# Altium PCB 创意组电机驱动.PcbDoc
Units mil, origin at the board's own origin, x right, y up, seen from the top; angles counter-clockwise.
Board outline 3300 x 1700 mil, 2 copper layers (Top Layer, Bottom Layer); 68 components, 50 nets, 201 pads, 117 vias.
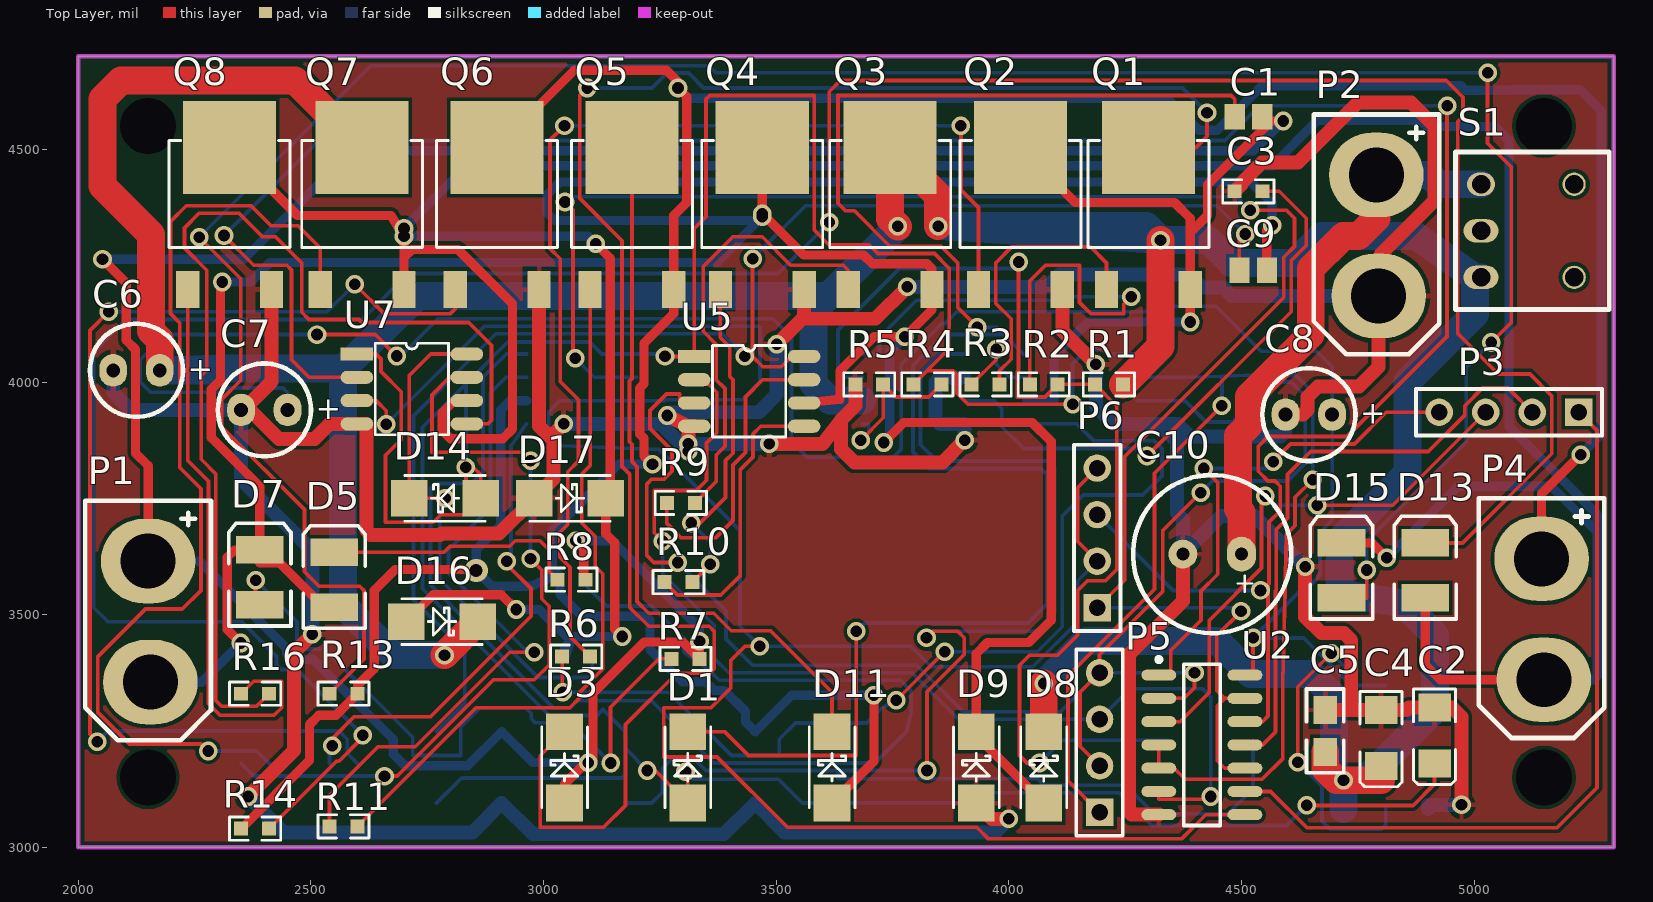
[diagram p0: Top Layer view]
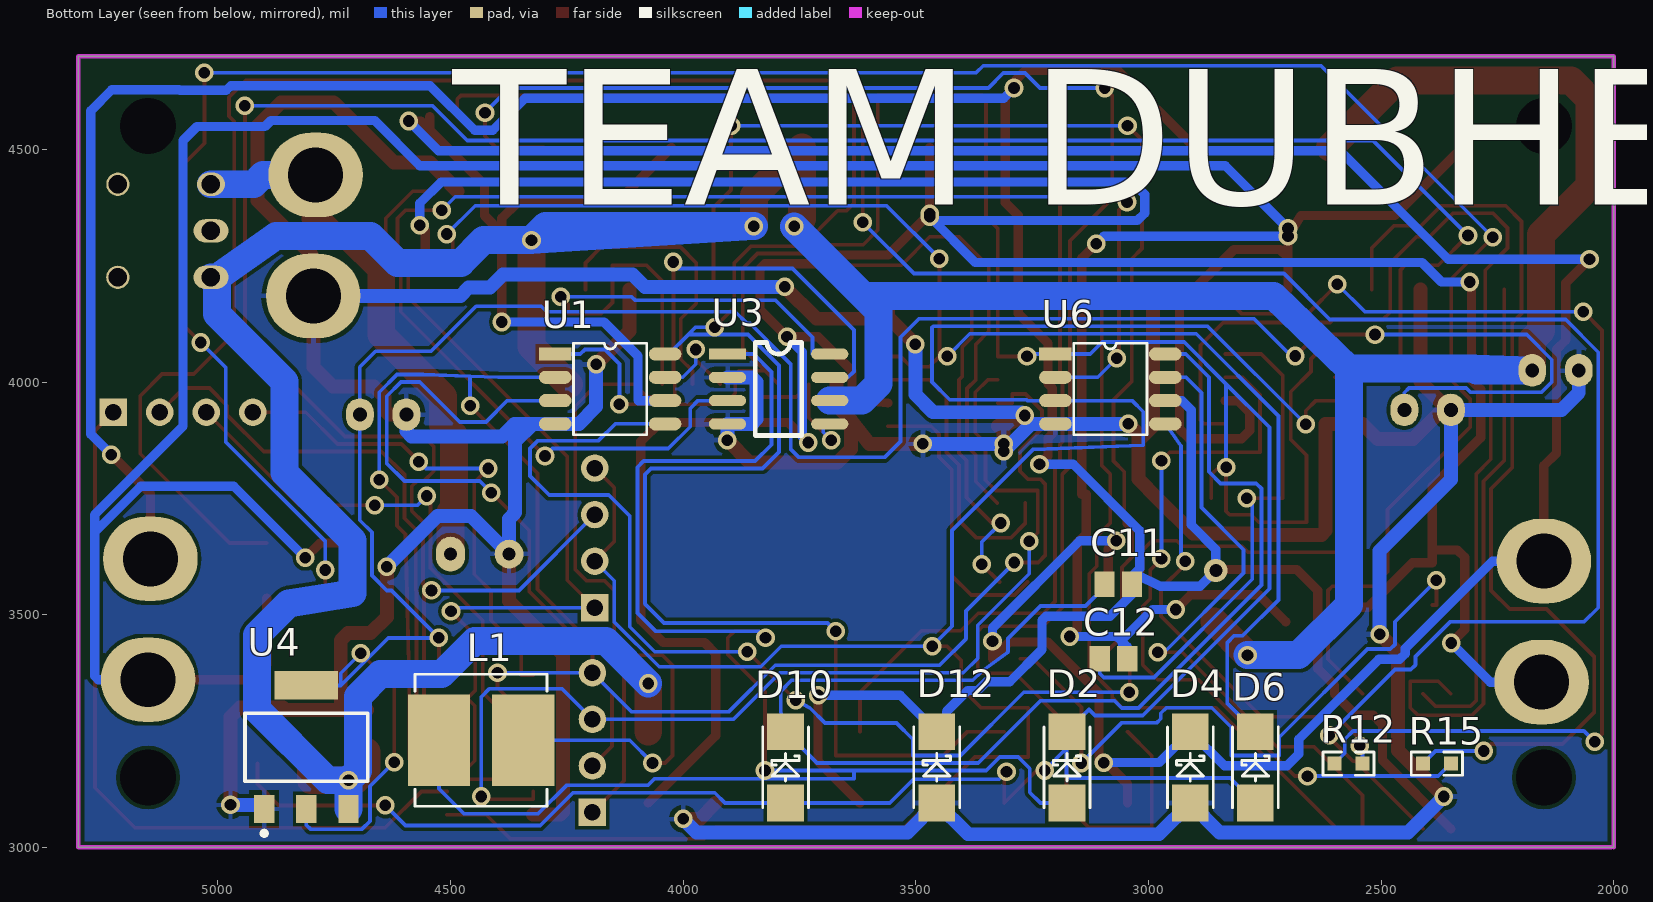
[diagram p1: Bottom Layer view, seen from below]
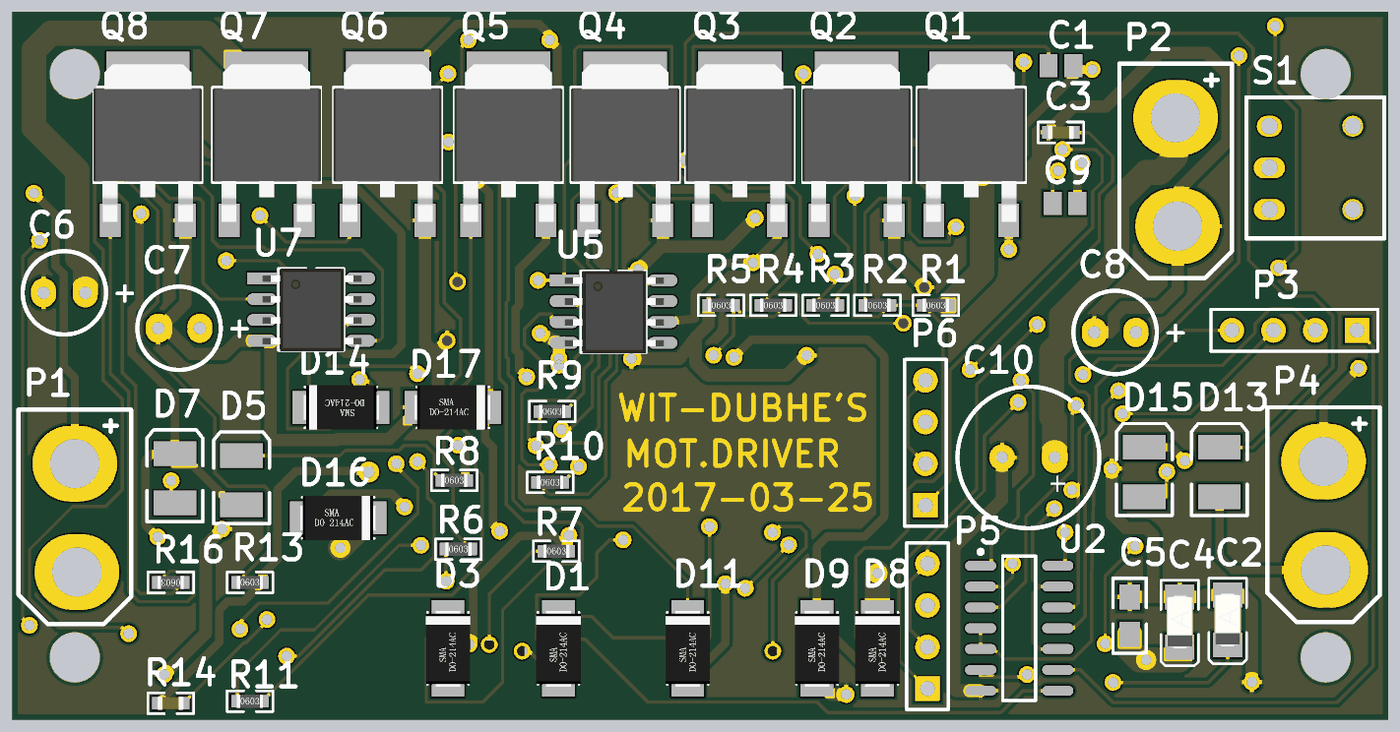
[diagram p2: 3D render of the assembled board from above, using the file's embedded part models]
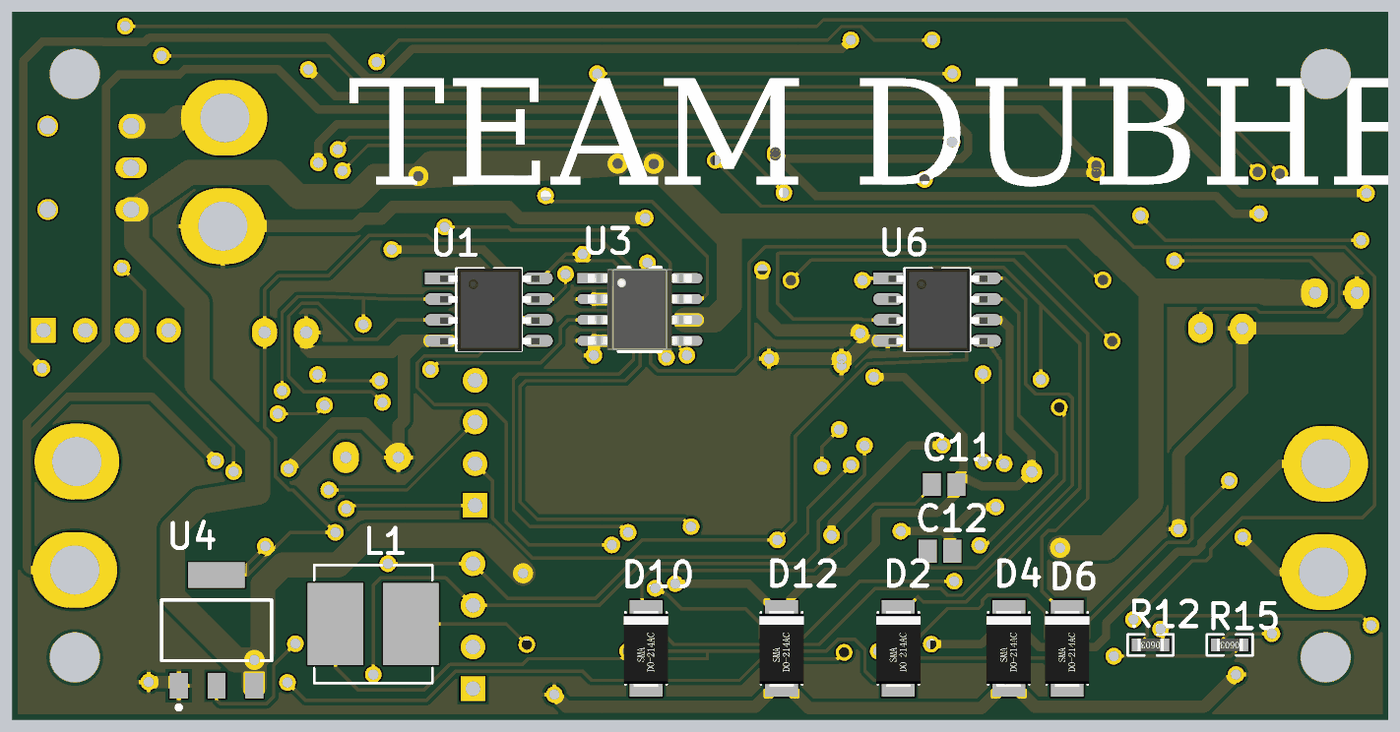
[diagram p3: 3D render of the assembled board from below, using the file's embedded part models]

## Layer stack, top to bottom
Top Solder: solder mask 0.4, Solder Resist, Dk 3.5
Top Layer: signal copper 1.4
Dielectric 1: dielectric 12.6, FR-4, Dk 4.8
Bottom Layer: signal copper 1.4
Bottom Solder: solder mask 0.4, Solder Resist, Dk 3.5

## Board outline
5300,3000 2000,3000 2000,4700 5300,4700

## Design rules (kind name [scope] priority, off if disabled: settings)
Clearance [All] p1: gap=8
PolygonConnect [All] p1: connectstyle=Relief reliefconductorwidth=10 reliefentries=4 polygonreliefangle="90 Angle" airgapwidth=10
RoutingVias [All] p1: holewidth=25 width=40 viastyle="Through Hole" minholewidth=28 minwidth=50 maxholewidth=28 maxwidth=50
SolderMaskExpansion [All] p1: expansion=4
Width BATT_CON [InNet('BATT_CON')] p1: maxlimit=60 minlimit=60 preferedwidth=60 minimp=50.000000 maximp=50.000000 favimp=50.000000
Width BATT [InNet('BATT')] p2: maxlimit=60 minlimit=60 preferedwidth=60 minimp=50.000000 maximp=50.000000 favimp=50.000000
Width GND [InNet('GND')] p3: maxlimit=30 minlimit=30 preferedwidth=30 minimp=50.000000 maximp=50.000000 favimp=50.000000
Width R- [InNet('PWR_OUT_R-')] p4: maxlimit=20 minlimit=20 preferedwidth=20 minimp=50.000000 maximp=50.000000 favimp=50.000000
Width R+ [InNet('PWR_OUT_R+')] p5: maxlimit=20 minlimit=20 preferedwidth=20 minimp=50.000000 maximp=50.000000 favimp=50.000000
Width L+ [InNet('PWR_OUT_L+')] p6: maxlimit=20 minlimit=20 preferedwidth=20 minimp=50.000000 maximp=50.000000 favimp=50.000000
Width L- [InNet('PWR_OUT_L-')] p7: maxlimit=20 minlimit=20 preferedwidth=20 minimp=50.000000 maximp=50.000000 favimp=50.000000
Width [All] p8: maxlimit=8 minlimit=8 preferedwidth=8
29 further rules are at their usual default settings.

## Components (designator, comment, footprint, x,y, rotation, side; value= is the part's Value field where it differs from the comment)
C1 "Cap Pol1" C0805 4515,4570 r0 top
C2 "10uF" 3216-CAP-TA 4915,3180 r90 top
C3 "470pF" 0603-CAP 4485,4410 r0 top
C4 "10uF" 3216-CAP-TA 4800,3175 r90 top
C5 "Cap Pol3" 0805 4680,3205 r90 top
C6 "Cap Pol1" "RB.1/.2 - duplicate" 2125,4025 r0 top
C7 "Cap Pol1" "RB.1/.2 - duplicate" 2400,3940 r0 top
C8 "Cap Pol1" "RB.1/.2 - duplicate" 4645,3930 r0 top
C9 "Cap Pol1" C0805 4525,4240 r0 top
C10 "Cap Pol1" CAPP 4500,3630 r180 top
C11 "Cap Pol1" C0805 3065,3565 r180 bottom
C12 "Cap Pol1" C0805 3075,3405 r180 bottom
D1 "Diode 1N4007" DO-214AC(SMA)-SBD 3310,3095 r90 top
D2 "1N5819" DO-214AC(SMA)-SBD 3174.99,3095 r90 bottom
D3 "1N5822" DO-214AC(SMA)-SBD 3045,3095 r90 top
D4 "1N5822" DO-214AC(SMA)-SBD 2909.99,3095 r90 bottom
D5 "LED0" 3.5X2.8X1.9 2550,3575 r90 top
D6 "Diode 1N4007" DO-214AC(SMA)-SBD 2769.99,3095 r90 bottom
D7 "LED0" 3.5X2.8X1.9 2390,3580 r90 top
D8 "1N5822" DO-214AC(SMA)-SBD 4075.01,3095 r90 top
D9 "1N5822" DO-214AC(SMA)-SBD 3930.01,3095 r90 top
D10 "Diode 1N4007" DO-214AC(SMA)-SBD 3779.99,3095 r90 bottom
D11 "1N5822" DO-214AC(SMA)-SBD 3620,3095 r90 top
D12 "1N5822" DO-214AC(SMA)-SBD 3454.99,3095 r90 bottom
D13 "LED0" 3.5X2.8X1.9 4895,3595 r90 top
D14 "Diode 1N4007" DO-214AC(SMA)-SBD 2865,3750 r180 top
D15 "LED0" 3.5X2.8X1.9 4715,3595 r90 top
D16 "1N5822" DO-214AC(SMA)-SBD 2705,3485 r0 top
D17 "1N5822" DO-214AC(SMA)-SBD 2980,3750 r0 top
L1 "330uH" Inductor_7*7*4 4525,3230 r180 bottom
P1 "POWER" POWER 2155,3355 r90 top
P2 "POWER" POWER 4795,4185 r90 top
P3 "Header 4" HDR1X4 5225,3935 r180 top
P4 "POWER" POWER 5150,3360 r90 top
P5 "Header 4" HDR1X4 4195,3075 r90 top
P6 "Header 4" HDR1X4 4190,3515 r90 top
Q1 "MOSFET N" TO-252 4210,4199 r0 top
Q2 "MOSFET N" TO-252 3935,4199 r0 top
Q3 "MOSFET N" TO-252 3655,4199 r0 top
Q4 "MOSFET N" TO-252 3380,4199 r0 top
Q5 "MOSFET N" TO-252 3100,4199 r0 top
Q6 "MOSFET N" TO-252 2810,4199 r0 top
Q7 "MOSFET N" TO-252 2520,4199 r0 top
Q8 "MOSFET N" TO-252 2235,4199 r0 top
R1 "0.22R" 0603-RES 4185,3995 r0 top
R2 "180R" 0603-RES 4045,3995 r0 top
R3 "Res1" 0603-RES 3920,3995 r0 top
R4 "10K" 0603-RES 3795,3995 r0 top
R5 "1.2K" 0603-RES 3670,3995 r0 top
R6 "Res1" 0603-RES 3040,3410 r0 top
R7 "Res1" 0603-RES 3275,3405 r0 top
R8 "Res1" 0603-RES 3030,3575 r0 top
R9 "Res1" 0603-RES 3265,3740 r0 top
R10 "Res1" 0603-RES 3260,3570 r0 top
R11 "Res1" 0603-RES 2540,3045 r0 top
R12 "Res1" 0603-RES 2540,3180 r0 bottom
R13 "Res1" 0603-RES 2540,3330 r0 top
R14 "Res1" 0603-CAP 2410,3040 r180 top
R15 "Res1" 0603-RES 2350,3180 r0 bottom
R16 "Res1" 0603-RES 2410,3330 r180 top
S1 "SW" SW 5015,4325 r0 top
U1 "IR2104S" SOIC-8 4275,4060 r180 bottom
U2 "74AC04M" SO14_L 4415,3220 r0 top
U3 "MC34063" SOP-8 3905,4060 r180 bottom
U4 "REG1117-3.3" ZZ311 4810,3215 r180 bottom
U5 "IR2104S" SOIC-8 3323.78,4055 r0 top
U6 "IR2104S" SOIC-8 3200,4060 r180 bottom
U7 "IR2104S" SOIC-8 2598.78,4060 r0 top

## Footprints (in the part's own frame and the unit in brackets; to place one, negate y for a bottom-side part, rotate by r counter-clockwise, add the part's x,y. Pads: shape width x height; smd on the part's side, far side on the other; paste and mask are expansions set on the pad)
3.5X2.8X1.9 [mm] "SM LED; 2 C-Bend Leads; Body 3.5 x 2.8 x 1.9 mm, inc leads (LxWxH typ)"
  rect 1.5x2.6 smd: 1(-1.5,0) 2(1.5,0)
  silkscreen extent -2.65,-1.7 2.95,1.7
0603-CAP [mil]
  rect 30x30 smd: 1(0,0) 2(60,0)
  silkscreen extent -25,-25 85,25, body extent -1,-16 61,16, height 24
0603-RES [mil]
  rect 30x30 smd: 1(0,0) 2(60,0)
  silkscreen extent -25,-25 85,25, body extent -1,-16 62,16, height 18
0805 [mil]
  rect 60x50 smd: 1(0,0) 2(90,0)
  silkscreen extent -45,-40 135,40
3216-CAP-TA [mil]
  rect 60x70 smd: 1(0,0) 2(120,0)
  silkscreen extent -45,-45 160,45, body extent -3,-31 123,32, height 63
C0805 [mm] "Chip Capacitor, Body 2.0x1.3mm, IPC High Density"
  rect 1.1x1.4 smd: 1(-0.75,0) 2(0.75,0)
  body extent -1.1,-0.72 1.1,0.72, height 1.4
CAPP [mil]
  oval 62x75 hole 28: 1(0,0)
  round 62 hole 28: 2(126,0)
  silkscreen extent -107,-170 233,170
DO-214AC(SMA)-SBD [mm]
  rect 2x2 smd: 1(0,0) 2(3.9,0)
  silkscreen extent -0.25,-1.25 4.15,1.25, body extent -0.37,-1.35 4.23,1.35, height 2.4
HDR1X4 [mm] "Connector; Header; 4 Position"
  rect 1.5x1.5 hole 0.9: 1(0,0)
  round 1.5 hole 0.9: 2(2.54,0) 3(5.08,0) 4(7.62,0)
  silkscreen extent -1.27,-1.27 8.89,1.27
Inductor_7*7*4 [mm]
  rect 3.4x5 smd: 1(0,0) 2(4.6,0)
  silkscreen extent -1.3,-3.6 5.9,3.6
POWER [mm]
  oval 4.615x5.159 hole 3: 1(0,0) 2(6.604,0.127)
  silkscreen extent -3.17,-3.3 9.91,3.56
"RB.1/.2 - duplicate" [mil]
  oval 60x70 hole 30: 1(50,0) 2(-50,0)
  silkscreen extent -100,-100 100,100
SO14_L [mm] "SOIC, 14-Leads, Body 8.7x3.9mm, Pitch 1.27mm, IPC High Density"
  oval 1.9x0.6 smd: 1(-2.35,3.81) 2(-2.35,2.54) 3(-2.35,1.27) 4(-2.35,0) 5(-2.35,-1.27) 6(-2.35,-2.54) 7(-2.35,-3.81) 8(2.35,-3.81) 9(2.35,-2.54) 10(2.35,-1.27) 11(2.35,0) 12(2.35,1.27) 13(2.35,2.54) 14(2.35,3.81)
  silkscreen extent -2.47,-4.4 1,4.78, body extent -1.95,-4.33 1.95,4.33, height 1.75
SOIC-8 [mm]
  rect 1.78x0.72 smd: 1(0,0)
  oval 1.78x0.72 smd: 2(0,-1.27) 3(0,-2.54) 4(0,-3.81) 5(6,-3.81) 6(6,-2.54) 7(6,-1.27) 8(6,0)
  silkscreen extent 1,-4.41 5,0.6, body extent 0.03,-4.44 6.07,0.58, height 1.6
SOP-8 [mil]
  rect 80x24 smd: 1(0,0)
  oval 80x24 smd: 2(0,-50) 3(0,-100) 4(0,-150) 5(220,-150) 6(220,-100) 7(220,-50) 8(220,0)
  silkscreen extent 60,-175 160,25, body extent -15,-173 235,24, height 74
SW [mil]
  oval 75x50 hole 40: 1(0,0) 3(0,-100)
  oval 60x50 hole 40: 2(0,100)
  round 50 hole 40: ""(200,100) ""(200,-100)
  silkscreen extent -55,-169 276,169
TO-252 [mil]
  rect 50x80 smd: 1(0,0) 3(180,0)
  rect 200x200 smd: 2(90,305)
  silkscreen extent -40,90 220,320, body extent -40,-4 220,374, height 92
ZZ311 [mm] "SOT-223/SC-73; 4 Leads; Body 6.7 x 7.3 mm, inc. leads (LxW max)"
  rect 1.1x1.55 smd: 1(-2.3,-3.375) 2(0,-3.375) 3(2.3,-3.375)
  rect 3.45x1.55 smd: 4(0,3.375)
  silkscreen extent -3.35,-4.82 3.35,1.85

## Part data
C1 C6 C7 C8 C9 C10 C11 C12: "Polarized Capacitor (Radial)"
C2 C4: library part CAP_TA_3216
C3: library part CAP_0603
C5: "Polarized Capacitor (Surface Mount)"
D1 D6 D10 D14: "1 Amp General Purpose Rectifier"
D3 D4 D8 D9 D11 D12 D16 D17: library part 1N4760A, "One Watt Hermetically Sealed Glass Silicon Zener Diode"
D5 D7 D13 D15: "Typical INFRARED GaAs LED"
L1: library part inductor_7*7*4
P3 P5 P6: "Header, 4-Pin"
R1 R2 R4 R5: library part RES_0603
R3 R6 R7 R8 R9 R10 R11 R12 R13 R14 R15 R16: "Resistor"
U2: "Hex Inverter"
U4: "800mA and 1A Low Dropout Positive Regulator 2.85V, 3.3V, 5V, and Adjustable"

## Free pads (board coordinates)
  round 60 hole 120: 0(2150,3150) 1(5150,3150) 2(2150,4550) 3(5150,4550)

## Via types
v1: diameter 40, hole 25, Top Layer to Bottom Layer, 116 vias
v2: diameter 50, hole 28, Top Layer to Bottom Layer, 1 vias

## Nets (pads, with @x,y where several pads share a name; then routed paths per layer and width w, separated by ;. In a path a pad name is that pad's centre, name@x,y a point inside that pad or via, vN(x,y) a via of type N, cw(c..) or ccw(c..) an arc to the next point about the centre after c; other vN are vias at no path point)
12V: C2.1 D1.1 D2.2 D6.1 D10.1 D14.1 R4.1 U1.1 U5.1 U6.1 U7.1 | length 7413.6
  Top Layer w8: U7.1 2640,4060 2650.38,4049.62 2650.38,4022.49 2694,3978.87 2694,3876.67 2660,3842.67 2660,3698.63 2763,3698.63 2778.88,3714.5 2825.45,3714.5 2833,3722.05 v1(2833,3817) 2849,3817 2865,3801 D14.1 ; v1(3222.99,3165) 3240,3165 D1.1 3310,3157 v1(3305,3162) ; v1(3261,4055) U5.1 3324,4055 3324,4330 3349,4355 3349,4608 3357,4616 3582,4616 3582,4326 3613,4295 3700,4295 3719,4276 3840,4276 3872,4244 3872,4072 3824,4024 ; R4.1 3824,4024 ; v1(4137,3952) 3912,3952 3888,3976 3888,4016 3880,4024 3824,4024 ; v1(4640,3090) 4869,3090 4915,3136 C2.1
  Bottom Layer w8: D6.1 2823.99,3149 3168,3149 3176,3157 D2.2@3176,3213 ; v1(2833,3817) 2833,3996 ; v1(3222.99,3165) D2.2@3176,3213 ; v1(3261,4055) 3256,4060 U6.1 3125.17,4060 3099,4086.17 2923.17,4086.17 2833,3996 ; v1(3305,3162) 3320.63,3146.37 3504.63,3146.37 3556,3095 D10.1 3910,3095 3932,3117 4237,3117 4307,3047 4597,3047 v1(4640,3090) ; v1(4137,3952) 4137,4039 4168,4070 4211,4070 4221,4060 U1.1 ; 2833,3996 2739.67,3902.67 2739.67,3555.62 3011.95,3283.34 3115,3283.34 3127.6,3295.94 D2.2 3174.99,3247.54 D2.2@3176,3213
BATT: C4.1 C5.1 C6.1 D8.2 D16.2 Q3.2 Q7.2 R1.2 S1.3 U3.6 U4.3 | length 9479.1
  Top Layer w60: C6.1 2175,4091 2156,4110 2156,4317.47 2052,4421.47 2052,4608 2092,4648 2466,4648 Q7.2 ; v1(2787,3413) 2787,3413.46 D16.2 ; v1(3761.5,4334.5) 3745,4351 Q3.2 3848,4401 v1(3848,4335) ; D8.2 v1(4075.01,3352) ; R1.2 4326,4076 v1(4326,4305) ; C5.1 4680,3168 4704,3144 v1(4719,3144) v1(4719.45,3144) 4800,3144 C4.1
  Bottom Layer w60: v1(2787,3413) 2677,3413 2569,3521 2569,4029 ; U3.6 3616,3960 3580,3996 3580,4153 3612,4185 ; v1(3761.5,4334.5) 3612,4185 ; v1(4075.01,3352) 4166.01,3443 4448,3443 4519,3372 4651,3372 4699.05,3323.95 4699.05,3164.4 4719,3144.45 v1(4719,3144) v1(4719.45,3144) ; U4.3 v1(4719.45,3144) ; S1.3 S1.3@5002,4225 ; 2299,4029 2569,4029 ; 2299,4029 2295,4025 C6.1 2299,4029 ; 2569,4029 2730.72,4185 3612,4185 ; v1(4326,4305) 4296,4335 v1(3848,4335) v1(4326,4305) ; v1(4326,4305) 4428.94,4305 4477.94,4256 4614,4256 4672,4314 4875,4314 S1.3@5002,4225 ; v1(4719.45,3144) 4764,3144 4916,3296 4916,3456 4848.13,3523.87 4711,3546 4711,3659 4857,3805 4857,4001 5002,4146 S1.3@5002,4225
BATT_CON: C10.1 P2.2 S1.2 | length 1193.5
  Top Layer w60: C10.1 4500,3720 4493,3727 4493,3885 4516,3908 4516,3969 4649,4102 4649,4244 4719,4314 4752,4314 4790,4352 P2.2
  Bottom Layer w60: P2.2 4903,4445 4923,4425 S1.2
GND: C2.2 C3.1 C4.2 C5.2 C6.2 C7.2 C8.2 C10.2 D4.1 D9.1 D12.1 D17.1 P2.1 Q2.3 Q4.3 Q6.3 Q8.3 R5.1 U1.4 U2.7 U3.2 U3.4 U4.1 U5.4 U6.4 U7.4 | length 12553.2
  Top Layer w30: C7.2 C7.2@2354.45,3940 ; v1(2365,3109) 2464,3208 2464,3419 v1(2503,3458) ; Q8.3 2415,4000.55 C7.2@2354.45,3940 ; Q6.3 2990,3905 3021.16,3873.84 ; v1(3043,3910) 3021.16,3888.16 3021.16,3873.84 ; v1(3266,3928) U5.4@3311,3905 ; v1(3311,3851) v1(3311,3867) U5.4@3311,3905 ; U5.4 U5.4@3311,3905 ; v1(3485,3867) 3600,3867 3639,3918 ; v1(3501,4081) 3560,4140 3560,4144 ; Q4.3 3560,4144 ; R5.1 3670,3949 3639,3918 ; v1(3782,4204.5) 3713.5,4136 3568,4136 3560,4144 ; v1(3905,3875) 3857,3827 3668,3827 3639,3856 3639,3918 ; D9.1 3964.01,3061 v1(4000,3061) ; Q2.3 4115,4110 v1(4187,4038) ; U2.7 4264,3070 4258.53,3075.47 4258.53,3414 4374,3529.47 C10.2 ; C3.1 4500,4425 4500,4428 4544,4472 4622,4472 4751,4601 4864,4601 4915,4550 4915,4390 4800,4275 4800,4185 P2.1 4795,4032 4753,3990 4664,3990 4642,3968 4642,3940 4632,3930 C8.2 ; v1(4637,3603) 4637,3495.05 4672,3460.05 4720,3460.05 4736,3444.05 4736,3311 4720,3295 ; C5.2 4720,3295 ; v1(4973,3091) 4973,3280 4953,3300 C2.2 4860,3300 4855,3295 C4.2 4720,3295 ; C7.2@2354.45,3940 2369,3940 2431,3878 2508,3878 2540,3910 U7.4 2619,3910 2619,3680.41 2627.79,3671.63 2777.63,3671.63 2780,3674 2904,3674 D17.1 3021.16,3791.16 3021.16,3873.84
  Bottom Layer w30: C6.2 2075,3977 2112,3940 C7.2 2350,3790 2503,3637 v1(2503,3458) ; v1(2365,3109) 2442,3032 2846.99,3032 D4.1 2976.99,3028 3387.99,3028 D12.1 3517.99,3032 3971,3032 v1(4000,3061) ; v1(3043,3910) U6.4 3252,3910 v1(3311,3851) ; v1(3266,3928) 3273,3935 3462.95,3935 3501,3973.05 v1(3501,4081) ; v1(3311,3867) v1(3485,3867) ; v1(3782,4204.5) 4082.5,4204.5 4109,4231 4387,4231 4415,4203 4461,4203 4479,4185 P2.1 ; v1(3905,3875) U3.4 3852,3910 3842,3920 3842,4000 3852,4010 U3.2 ; v1(4187,4038) 4187,3947 4224,3910 U1.4 4323,3910 ; C8.2 4595,3894.29 4584,3883.29 4389,3883.29 4362.29,3910 4323,3910 ; v1(4637,3603) 4528,3712 4456,3712 C10.2 4374,3706 4361,3719 4361,3872 4323,3910 ; U4.1 4900.55,3091 v1(4973,3091)
MOTOR_DIR_L: P3.3 U2.3 | length 1171.4
  Top Layer w8: U2.3 4368,3270 4431,3333 4431,3488 4543,3600 4543,3747 v1(4551,3755) ; v1(4663,3735) 4825,3735 P3.3
  Bottom Layer w8: v1(4551,3755) 4571,3735 v1(4663,3735)
MOTOR_DIR_R: P3.2 U2.11 | length 1277
  Top Layer w8: U2.11 4545,3220 4573,3248 4573,3550.98 4575,3552.98 4575,3682.82 4599.18,3707 4599.18,3801.05 4648.79,3850.66 4901.66,3850.66 4980.18,3929.18 4980.18,3949.18 5017.94,3986.94 5073.06,3986.94 P3.2
MOTOR_PWM_L: P3.4 U2.1 | length 1079.9
  Top Layer w8: U2.1 4348,3370 4348,3423 4413,3488 4413,3551 4449,3587 4449,3784 v1(4419,3814) ; v1(4568,3829) 4605.66,3866.66 4742.66,3866.66 4811,3935 P3.4
  Bottom Layer w8: v1(4419,3814) 4553,3814 v1(4568,3829)
MOTOR_PWM_R: P3.1 U2.9 | length 1647.6
  Top Layer w8: U2.9 4562.59,3120 4640.59,3042 5178,3042 5264,3128 5264,3896 P3.1
NetC1_1: C1.1 D1.2 U1.8 | length 3801.7
  Top Layer w8: D1.2 3388.96,3248.54 3440.5,3197 3672,3197 v1(3672,3464) ; v1(3932,4118) 3890,4160 3890,4256 3854,4292 3744,4292 3668,4368 3649,4368 3633,4384 3633,4616 4477.47,4616 4485.47,4608 C1.1
  Bottom Layer w8: v1(3672,3464) 3690,3482 4041,3482 4082.12,3523.12 4082.12,3801.26 4069.38,3814 3829.37,3814 3794,3849.37 3794,4035.65 3860.35,4102 3988.79,4102 ; v1(3932,4118) 3972.79,4118 3988.79,4102 ; U1.8 4030.79,4060 3988.79,4102
NetC3_2: C3.2 U3.3 | length 1234.8
  Top Layer w8: v1(4297,3841) 4607,4151 4607,4261.4 4639.02,4293.42 4639.02,4352 4581.02,4410 C3.2
  Bottom Layer w8: U3.3 3968,3960 3985,3943 3985,3904 4032,3857 4281,3857 v1(4297,3841)
NetC9_1: C9.1 D6.2 U5.8 | length 3135.1
  Top Layer w8: v1(3432.58,4055) v1@3449.27,4055 ; v1(3449.27,4265.27) v1@3449.27,4055 ; U5.8 3533,4055 3511,4033 3471.27,4033 v1@3449.27,4055 ; C9.1 4495.47,4305.47 v1(4508,4318)
  Bottom Layer w8: D6.2 2830.26,3308.81 2830.26,3440.19 2816,3454.45 2797.64,3454.45 2720.51,3531.57 2720.51,3926.93 2897.08,4103.5 3384.08,4103.5 v1(3432.58,4055) ; v1(3449.27,4265.27) 3563,4379 4447,4379 v1(4508,4318)
NetC11_1: C11.1 D10.2 U6.8 | length 2771
  Bottom Layer w8: U6.8 2919.63,4060 2870,4010.37 2870,3807 2845,3782 2768,3782 2757,3771 2757,3563.8 3021.46,3299.34 3057.14,3299.34 3072.8,3315 3231.94,3315 3365.77,3181.17 3712.62,3181.17 D10.2 3790,3291.55 3790,3336 3767,3359 3377.34,3359 3358.83,3377.51 3301.67,3420 3301.67,3448.92 3232,3518.59 3134.94,3518.59 3094.53,3559 C11.1
NetC12_1: C12.1 D14.2 U7.8 | length 1113.1
  Top Layer w8: v1(2789,3750) D14.2 2711.46,4014.03 2757.43,4060 U7.8
  Bottom Layer w8: v1(2789,3750) 2777,3738 2777,3576 2988,3365 3096,3365 3104.53,3373.53 C12.1
NetD2_1: D2.1 L1.1 U3.1 | length 3396.3
  Top Layer w8: v1(3823,3450) 3837,3464 3890.44,3464 3904,3450.44 3904,3414.28 3824,3334.28 v1(3824,3165)
  Bottom Layer w8: D2.1 3232,3095 3255,3118 3255,3169 3280,3194 3319.5,3194 3348.5,3165 3633,3165 ; v1(3823,3450) 3837,3464 4058.5,3464 4098.12,3503.62 4098.12,3816.88 4085,3830 3845.37,3830 3810,3865.37 3810,4021.61 3848.39,4060 U3.1 ; v1(3824,3165) 3633,3165 ; L1.1 4525,3126 4471,3072 4312,3072 4251,3133 4076,3133 4062,3147 3633,3147 3633,3165
NetD3_2: D3.2 Q1.2 | length 3862.1
  Top Layer w8: D3.2 2993,3196.55 2993,3043 3129,3043 3176,3090 3176,3264 3286,3374 3357,3374 3367,3384 3367,3464 3356,3475 3226,3475 3184.92,3516.08 3184.92,3802 3168.74,3818.18 3168.74,4303.76 3078,4394.5 3078,4616 v1(3094,4632) ; Q1.2 4402,4504 4426,4528 v1(4426,4579)
  Bottom Layer w8: v1(3094,4632) 3233,4632 3265,4664 3312,4664 3344,4632 4373,4632 v1(4426,4579)
NetD5_2: D5.2 R8.1 | length 551.7
  Top Layer w8: D5.2 2786.06,3634.05 2799.01,3647 2927.43,3647 2939.17,3658.74 2992,3658.74 3012.04,3638.7 3012.04,3592.96 R8.1
NetD7_1: D7.1 R7.1 | length 1461.2
  Top Layer w8: v1(2381,3574) 2381,3520.94 D7.1 ; v1(3144,3181) 3144,3301 3248,3405 R7.1
  Bottom Layer w8: v1(2381,3574) 2470.15,3484.85 2470.15,3435.85 2480,3426 2529,3426 2718.62,3236.38 2718.62,3197.17 2822,3197.17 2822,3258 2864,3300 2961.28,3300 2973.28,3288 2973.28,3276.43 2982.37,3267.34 3057.66,3267.34 v1(3144,3181)
NetD11_2: D11.2 Q5.2 | length 1569.3
  Top Layer w8: Q5.2 3190,4007.26 3184.74,4002 3184.74,3871.43 3190,3866.17 3190,3828.92 3200.92,3818 3200.92,3528.1 3226.02,3503 3365.54,3503 3403.2,3465.35 3488,3465.35 3620,3333.35 D11.2
NetD13_2: D13.2 R14.1 | length 6148.1
  Top Layer w8: R14.1 2555.08,3185.08 2560,3185.08 2611,3236.08 v1(2611,3241) ; v1(3614,4343) 3614,4624 3638,4648 4940,4648 4976,4612 4976,4571 4965,4560 4965,4104 5052,4017 5120,4017 5167,3970 5167,3846 4975.05,3654.05 D13.2
  Bottom Layer w8: v1(2611,3241) 2470,3382 2436.15,3382 2426.15,3392 2426.15,3409.85 2351,3485 2063,3485 2033,3515 2033,4064 2103.17,4134.17 2610.04,4134.17 2708.86,4233 3504,4233 v1(3614,4343)
NetD15_1: D15.1 R13.1 | length 5504.9
  Top Layer w8: v1(2260,4311) 2349,4222 2349,4003.55 2308,3962.55 2308,3904 2486,3726 2486,3592 2517,3561 2605,3561 2614,3552 2614,3404 R13.1 ; D15.1 4769,3535.94 v1(4769,3596) ; v1(5029,4665) 5029,4513 5080,4462 5080,4128 v1(5037,4085)
  Bottom Layer w8: v1(2260,4311) 2629,4680 3355,4680 3370,4665 v1(5029,4665) ; v1(4769,3596) 4769,3657 4983,3871 4983,4031 v1(5037,4085)
NetL1_2: L1.2 R1.1 R2.2 U3.7 | length 2375.6
  Top Layer w8: v1(4021,4258) 4021,4025 4018,4022 4018,3968 4078,3968 R2.2 R1.1 4232,3948 4232,3597 4208,3573 4169,3573 4148,3552 4148,3456 4105,3413 4045,3413 4023,3391 4023,3197 4039,3181 v1(4066,3181)
  Bottom Layer w8: U3.7 3645.5,4010 3633,4022.5 3633,4112 3765,4244 4009,4244 4021,4256 v1(4021,4258) ; v1(4066,3181) 4115,3230 L1.2
NetP5_1: P5.1 U1.2 U2.4 U2.5 | length 2652.2
  Top Layer w8: P5.1 4127,3143 4127,3368.47 4313,3554.47 4313,3804 v1(4458,3949) ; U2.4 U2.5 4355,3170 4379,3146 4544,3146 4589,3191 4589,3354.18 4596.82,3672.63 4615.18,3691 4615.18,3752.18 v1(4653,3790)
  Bottom Layer w8: U1.2 4397,4010 4458,4012.58 ; v1(4458,3949) 4458,4012.58 ; v1(4653,3790) 4653,3978 4615,4016 4559,4016 4458,4012.58
NetP5_2: P5.2 P5.4 U1.3 U2.2 U5.3 | length 3538.6
  Top Layer w8: v1(3288,3612) 3237,3612 3222,3627 3222,3780.86 3232,3790.86 3258.86,3790.86 3276,3808 3276,3852.83 3228.74,3900.09 3228.74,3938.91 3264,3974.17 3292.74,3974.17 3292.74,3955 U5.3 ; P5.2 4153,3217 4153,3333 P5.4 4195,3413.84 4331,3549.84 4331,3680.82 v1(4412.18,3762) ; U2.2 4376,3320 4399,3343 v1(4399,3375)
  Bottom Layer w8: v1(3288,3612) 3392,3508 3392,3447.91 3448.91,3391 3802,3391 3901.48,3291.52 4111.52,3291.52 P5.4 v1(4399,3375) ; U1.3 4378,3960 4424,3914 4480,3914 4566,4000 4606.3,4000 4637,3969.3 4637,3824.86 4599.14,3787 4437.18,3787 v1(4412.18,3762)
NetP5_3: P5.3 U2.6 U5.2 | length 2294.1
  Top Layer w8: v1(3256,3658) 3238,3676 3238,3767 3328,3767 3350,3789 3350,3869 3372,3891 3372,3978 3345,4005 U5.2 ; U2.6 4322.48,3103 4428,3103 v1(4434,3109)
  Bottom Layer w8: v1(3256,3658) 3256,3588 3367,3477 3367,3406 3398,3375 3792,3375 3892,3275 P5.3 4261,3341 4416,3341 4434,3323 v1(4434,3109)
NetP6_1: P6.1 U2.10 U2.13 U6.2 | length 3876.5
  Top Layer w8: v1(3046,4387) 3063,4370 3063,4056 v1(3068,4051) ; P6.1 4249,3574 4249,3839.89 4591,4181.89 4591,4268.03 4614,4291.03 4614,4352 4597,4369 v1(4519,4369) ; v1(4499,3507) 4447,3455 4447,3337 4464,3320 ; U2.10 4464,3170 4448,3186 4448,3304 4464,3320 ; U2.13 4464,3320
  Bottom Layer w8: v1(3046,4387) 3057,4398 4490,4398 v1(4519,4369) ; v1(3068,4051) 3109,4010 U6.2 ; P6.1 4491,3515 v1(4499,3507)
NetP6_2: P6.2 P6.4 U2.8 U6.3 U7.3 | length 5282.7
  Top Layer w8: U7.3 2640,3960 2662,3938 v1(2662,3909) ; v1(3465,3432) 3433,3432 3402.3,3401.3 3402.3,3342.3 3360,3300 3258,3300 3258,3194 3373,3194 3524,3043 3931,3043 3956,3018 4371,3018 4423,3070 U2.8 ; P6.2 4148,3657 4148,3773 P6.4
  Bottom Layer w8: v1(2662,3909) 2873,4120 3462,4120 3465,4117 3465,4000 3427,3962 3262,3962 3260,3960 U6.3 3035,3960 3011,3936 3011,3864 3248,3855 3422,3681 3422,3475 v1(3465,3432) 3789,3432 3833,3388 4051.61,3388 4148,3484.39 4148,3573 P6.2
NetP6_3: P6.3 U2.12 U7.2 | length 5384.2
  Top Layer w8: v1(2313,4315) 2377,4251 2448,4251 2458,4241 2458,4048 2496,4010 U7.2 ; U2.12 4545,3270 4557,3282 4557,3536 ; v1(4541,3552) 4557,3536 ; v1(4942,4594) 4942,4098 4726.66,3882.66 4557,3882.66 4536,3861.66 4536,3808 4557,3787 4572.18,3787 4583.18,3776 4583.18,3723 4559,3698.82 4559,3566.98 4557,3564.98 4557,3536
  Bottom Layer w8: v1(2313,4315) 2517,4519 4464,4519 4539,4594 v1(4942,4594) ; P6.3 4353,3552 v1(4541,3552)
NetQ1_1: Q1.1 R3.2 | length 608.2
  Top Layer w8: R3.2 3980,4024 4005,4049 4005,4136 3972,4169 3972,4256 4006,4290 4176,4290 4210,4256 Q1.1
NetQ2_1: Q2.1 R6.2 | length 2442.3
  Top Layer w8: v1(3045,4551) 3014,4520 3014,4287 3036,4265 3036,4001 3075,3962 3075,3830 3052,3807 3052,3694 3035,3677 3035,3624 3057,3602 3057,3453 R6.2 ; v1(3897,4551) 3897,4413 3935,4375 Q2.1
  Bottom Layer w8: v1(3045,4551) v1(3897,4551)
NetQ3_1: Q3.1 R9.2 | length 963.6
  Top Layer w8: R9.2 3370.82,3785.82 3370.82,3842.77 3389.88,3861.83 3389.88,3986.03 3370.82,4005.09 3370.82,4081.17 3343,4108.99 3343,4248 3407,4312 3470,4312 3531,4251 3644,4251 3655,4240 Q3.1
NetQ4_1: Q4.1 R10.2 | length 721.3
  Top Layer w8: v1(3317,3697) 3336,3697 3391,3752 3391,3831 3407,3847 3407,4005 3400,4012 3400,4075 3380,4095 Q4.1 ; R10.2 v1(3358,3608)
  Bottom Layer w8: v1(3317,3697) 3358,3656 v1(3358,3608)
NetQ5_1: Q5.1 R11.2 | length 1516.1
  Top Layer w8: R11.2 2855,3300 3056,3300 3078,3322 3078,3334 3127,3383 3127,3588 3111.13,3603.87 3111.13,3667.87 3082,3697 3082,3802 3100,3820 Q5.1
NetQ6_1: Q6.1 R12.2 | length 2404.2
  Top Layer w8: v1(2041,3227) 2025,3243 2025,4111 v1(2065,4151) ; v1(2594,4210.28) 2657.28,4147 2800,4147 2810,4157 Q6.1
  Bottom Layer w8: v1(2041,3227) 2064,3250 2560,3250 2578,3232 2578,3202 R12.2 ; v1(2065,4151) 2534.72,4151 v1(2594,4210.28)
NetQ7_1: Q7.1 R15.2 | length 2097.1
  Top Layer w8: v1(2279,3207) 2264,3222 2110,3222 2041.44,3290.56 2041.44,3409.11 2144.33,3512 2223.56,3512 2263.56,3552 2263.56,3770.46 2218,3816.02 2218,4127 2198,4147 2198,4345 2232,4379 2371.31,4379 2414.31,4336 2472,4336 2520,4288 Q7.1
  Bottom Layer w8: v1(2279,3207) 2383,3207 R15.2
NetQ8_1: Q8.1 R16.2 | length 1238.4
  Top Layer w8: Q8.1 2235,3831.02 2279.56,3786.46 2279.56,3308.44 2304,3284 2421,3284 2437,3300 2437,3357 2377,3357 R16.2
NetR2_1: R2.1 U3.8 | length 1220.7
  Top Layer w8: R2.1 4045,4217 4079,4251 4152,4251 4152,4171 4176,4147 4247,4147 4247,4167 v1(4263,4183)
  Bottom Layer w8: U3.8 3722,4060 3722,4096 3801.97,4175.97 4103.51,4175.97 4110.54,4183 v1(4263,4183)
NetR3_1: R3.1 U1.7 | length 206.3
  Top Layer w8: R3.1 3973,4048 v1(3973,4070)
  Bottom Layer w8: v1(3973,4070) 3973,4038 4001,4010 U1.7
NetR4_2: R4.2 R5.2 U3.5 | length 343.3
  Top Layer w8: v1(3682,3875) 3730,3923 R5.2 3757,3968 3828,3968 R4.2
  Bottom Layer w8: v1(3682,3875) 3699,3892 3699,3910 U3.5
NetR6_1: R6.1 U1.5 | length 2198.9
  Top Layer w8: R6.1 3040,3334 v1(3041,3333) ; v1(3758,3316) v1(3862,3420)
  Bottom Layer w8: v1(3041,3333) 3267.79,3333 3403.62,3197.17 3506.36,3197.17 3506.36,3232 3541.36,3267 3695,3267 3728,3300 v1(3758,3316) ; v1(3862,3420) 4060.98,3420 4115,3474.02 4115,3712 4160,3757 4288,3757 4329,3798 4329,3857 4312,3874 4182,3874 4146,3910 U1.5
NetR9_1: R9.1 U5.7 | length 632.5
  Top Layer w8: R9.1 3265,3696 3296,3665 3369.48,3665 3407,3702.52 3407,3821.83 3433.82,3848.65 3433.82,3968 3470.82,4005 U5.7
NetR10_1: R10.1 U5.5 | length 624.2
  Top Layer w8: R10.1 3288,3542 3381,3542 3423,3584 3423,3812 3450,3839 3450,3888 3467,3905 U5.5
NetR11_1: R11.1 U6.7 | length 1405.6
  Top Layer w8: R11.1 2540,3111.88 2644.12,3216 2724.29,3216 2927.29,3419 v1(2980,3419)
  Bottom Layer w8: U6.7 2919,4010 2886,3977 2886,3730 2795.56,3639.56 2795.56,3589.44 2966,3419 v1(2980,3419)
NetR12_1: R12.1 U6.5 | length 1045.5
  Top Layer w8: v1(2546,3218) 2546,3234 2592.37,3280.37 2756.74,3280.37 2973,3496.63 2973,3556 2921,3608 v1(2921,3615)
  Bottom Layer w8: R12.1 2540,3218 v1(2546,3218) ; v1(2921,3615) 2930,3624 2930,3862.51 2963,3910 U6.5
NetR15_1: R15.1 U7.7 | length 1660.8
  Top Layer w8: v1(2658,3153) 2685.37,3153 2892.37,3360 2980,3360 3012,3392 3012,3518 2996,3534 2996,3596 v1(2972,3620) ; U7.7 2797.96,4010 2759.96,3972 2759.96,3849.2 2954,3849 v1(2972,3831)
  Bottom Layer w8: R15.1 2377,3153 v1(2658,3153) ; v1(2972,3620) v1(2972,3831)
NetR16_1: R16.1 U7.5 | length 2254.5
  Top Layer w8: R16.1 2383,3303 2308,3303 2295.56,3315.44 2295.56,3802.46 2264,3834.02 2264,4014 2276,4026 2276,4240 2228,4288 2228,4331 2260,4363 2345,4363 2396,4312 2424,4312 2480,4256 2480,4150.17 2496,4134.17 2603.47,4134.17 2609.65,4128 2839,4128 2888,4079 2888,3918 2880,3910 U7.5
PWR_OUT_L+: C1.2 D3.1 D4.2 P1.2 Q1.3 Q2.2 R7.2 R8.2 U1.6 | length 7118.4
  Top Layer w20: v1(2052,4264) 2103,4213 2103,4090 2123,4070 2123,3847 2150,3820 P1.2 ; D3.1 3045,3136 3091,3182 v1(3096,3182) 3106,3182 3106,3330.89 3216.11,3441 3299,3441 R7.2 v1(3335,3443) ; v1(3069.02,3659) 3086.41,3641.61 3086.41,3578.59 R8.2 ; Q2.2 4143,4386 4356,4386 4390,4352 4390,4321 ; v1(4390,4129) Q1.3 4390,4321 ; C1.2 4544.53,4541.53 ; v1(4590,4561) 4564,4561 4544.53,4541.53 ; 4390,4321 4427,4358 4427,4424 4544.53,4541.53
  Bottom Layer w20: v1(2052,4264) 2355.25,4264 2588.25,4497 4526,4497 v1(4590,4561) ; P1.2 2260.42,3615 2448.15,3427.27 2448.15,3416 2460.15,3404 2504.61,3404 2676.61,3232 2676.61,3200.51 2701.95,3175.17 2836.62,3175.17 D4.2 2976.54,3182 v1(3096,3182) ; v1(3069.02,3659) 3147.42,3659 3335,3471.42 v1(3335,3443) ; U1.6 4096,3960 4096.89,3960.89 4096.89,4055.89 4170,4129 v1(4390,4129)
PWR_OUT_L-: C9.2 D5.1 D7.2 D8.1 D9.2 P1.1 Q3.3 Q4.2 U5.6 | length 7466.4
  Top Layer w20: v1(2309,4215) 2305.45,4211.45 2305.45,4004 2286,3984.55 2286,3880 2390,3776 D7.2 ; v1(2349,3439) 2320,3468 2320,3623.05 2336,3639.05 D7.2 ; D5.1 2528,3515.94 2432.47,3611.47 2390,3611.47 D7.2 ; v1(3470,4355) v1(3470,4362) ; Q4.2 v1(3470,4362) ; U5.6 3637,3963 3637,4024 3710,4097 v1(3776.68,4097) 3835,4155.32 Q3.3 3835,4243 3824,4254 3706.79,4254 3687.79,4273 3559,4273 v1(3470,4362) ; v1(3731,3870) 3774,3913 4050,3913 4091,3872 4091,3488 4043,3440 3954.01,3440 3930.01,3416 D9.2 3930.01,3240 D8.1 ; C9.2 4554.53,4325.53 v1(4566,4337)
  Bottom Layer w20: P1.1 2265,3355 v1(2349,3439) ; v1(2309,4215) 2370,4215 2412,4257 3372,4257 v1(3470,4355) ; v1(3470,4362) 3455,4347 3024,4347 3008,4363 3008,4403 3035,4430 4520,4430 4566,4384 v1(4566,4337) ; v1(3731,3870) 3744,3883 3744,4064.32 v1(3776.68,4097)
PWR_OUT_R+: C11.2 D11.1 D12.2 P4.2 Q5.3 Q6.2 R13.2 R14.2 U6.6 | length 7552.5
  Top Layer w20: R14.2 2497,3187 2497,3264 2516.99,3283.99 2553.99,3283.99 R13.2 2600,3348 2636,3384 2636,3552 2681,3597 v2@2850,3597 ; Q6.2 3066,4670 3264,4670 3295.5,4638.5 v1(3289,4632) 3308,4613 3308,4386 3280,4358 Q5.3 3280,4147.29 3216,4083.29 3216,3996.17 3206.74,3986.91 3206.74,3888.17 3216,3878.91 3216,3841 v1(3234,3823) ; D11.1 3710,3185 v1(3710,3327) ; P4.2 5145,3760 v1(5229,3844)
  Bottom Layer w20: U6.6 2928,3960 2908,3940 2908,3693 2855,3640 v2(2855,3595) 2889.15,3560.85 2974.71,3560.85 3025.42,3585.6 C11.2 ; v1(3234,3823) 3161.73,3823 3018.73,3680 3018.73,3599.3 3035.47,3582.56 C11.2 ; v1(3289,4632) 3311,4610 4340,4610 4409,4541 4448,4541 4544,4637 4972,4637 4982,4627 5082,4627 5083,4628 5228,4628 5273,4583 5273,3888 v1(5229,3844) ; v1(3710,3327) 3533.45,3327 D12.2 3433.82,3269.72 3433.82,3291.57 3388.38,3337 3366.53,3337 3348.03,3355.51 3298.12,3355.51 3228.75,3424.87 3228.75,3488 3220.3,3496.45 3082.55,3496.45 3035.47,3543.53 C11.2
PWR_OUT_R-: C12.2 D13.1 D15.2 D16.1 D17.2 P4.1 Q7.3 Q8.2 U7.6 | length 8252.7
  Top Layer w20: Q8.2 2471,4358 2672,4358 2692.37,4325.26 v1(2700,4313) ; Q7.3 2700,4268 ; v1(2700,4330) v1(2700,4313) ; D16.1 2763,3543 2909,3543 v1(2941,3511) ; U7.6 2808,3960 2781.96,3933.96 2781.96,3895.87 2800,3877.83 2912,3877.83 2933,3898.83 2933,4168 2816,4285 2717,4285 2700,4268 ; v1(3112,4297) 3143,4266 3143,3759 3133.54,3759 D17.2 3133.54,3673.96 3153,3654.5 3153,3469 v1(3169,3453) ; D15.2 4780.05,3654.05 v1(4812.05,3622.05) ; D13.1 4895,3392 4927,3360 P4.1 ; 2700,4268 v1(2700,4313)
  Bottom Layer w20: v1(2700,4313) 3096,4313 v1(3112,4297) ; v1(2700,4330) 2835,4465 4566,4465 4663,4562 4886.01,4562 4899.01,4549 5045,4549 5075,4519 5075,3905 5265,3715 5265,3677 ; v1(2941,3511) 2990.79,3511 3058.13,3443.66 ; v1(3169,3453) 3067.47,3453 3058.13,3443.66 ; v1(4812.05,3622.05) 4966,3776 5166,3776 5265,3677 ; P4.1 5257,3360 5265,3368 5265,3677 ; 3058.13,3443.66 C12.2 3045.47,3431 3058.13,3443.66
VCC_DRV_3.3: C7.1 C8.1 U2.14 U4.2 U4.4 | length 5370.5
  Top Layer w8: v1(2513,4102) 2638,4102 v1(2684,4056) ; U2.14 4525,3370 v1(4525,3450) ; v1(4621,3183) 4621,3345 v1(4693,3417)
  Bottom Layer w8: C7.1 2450,3977 2440,3987 2317,3987 2308,3978 2155,3978 2133,4000 2133,4048 2187,4102 v1(2513,4102) ; v1(2684,4056) 2693,4056 2773,4136 3493,4136 3533,4096 3533,3872 3567,3838 3751,3838 3769,3856 3769,4039 3856,4126 3863,4126 3888,4151 4293,4151 4305,4163 4445,4163 4542,4066 4661,4066 4695,4032 C8.1 4695,3703 4669,3677 4669,3584 4637,3552 4627,3552 v1(4525,3450) 4633.87,3450 4736,3347.87 ; v1(4621,3183) 4673,3131 4673,3056 4690,3039 4801,3039 4810,3048 U4.2 ; v1(4693,3417) 4736,3374 4736,3347.87 ; U4.4 4736,3347.87
pads on no net: S1. S1.1

## Polygon pours and split planes (outlines as drawn)
GND on Top Layer "Bottom Layer-No Net" (solid, remove dead copper, pour order 4): 1675,4800 1710,4835 5705,4835 5705,2955 5475,2725 5400,2800 1425,2800
GND on Bottom Layer "Bottom Layer-No Net" (solid, remove dead copper, pour order 6): 1775,4930 1800,4955 5665,4955 5665,2935 5535,2805 5500,2840 1740,2840

## Keep-outs
Keep-Out Layer:
  lines w10: 2000,3000 2000,4700 5250,4700 5300,4700 5300,3000 5200,3000 ; 2005,3000 5250,3000

## Silkscreen, mask and mechanical layers (free items; w line width, h text height)
Bottom Overlay:
  text "TEAM DUBHE" at 4495,4285 h500
Top Solder:
  text "WIT-DUBHE'S" at 3445,3720 h60
  text "MOT.DRIVER" at 3460,3610 h60
  text "2017-03-25" at 3455,3505 h60

## Text inside footprints (layer, text, board x,y; h text height)
C6: Top Overlay "+" at 2235,4005 h48
C7: Top Overlay "+" at 2510,3920 h48
C8: Top Overlay "+" at 4755,3910 h48